# EAGLE board lv1-imu-array-1 (EAGLE 3.55)
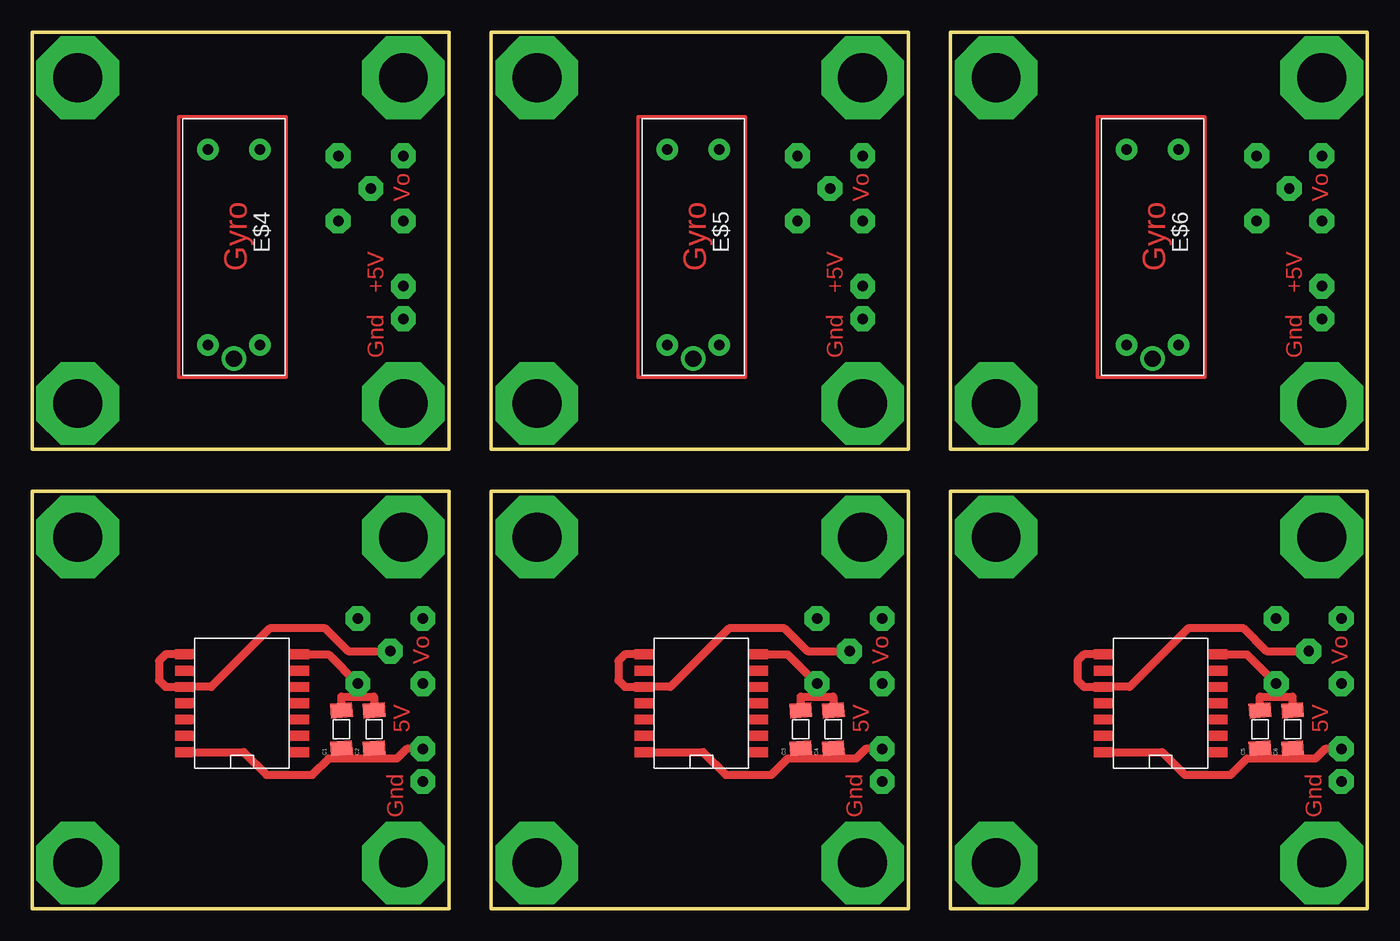
[diagram p0: board, top side]
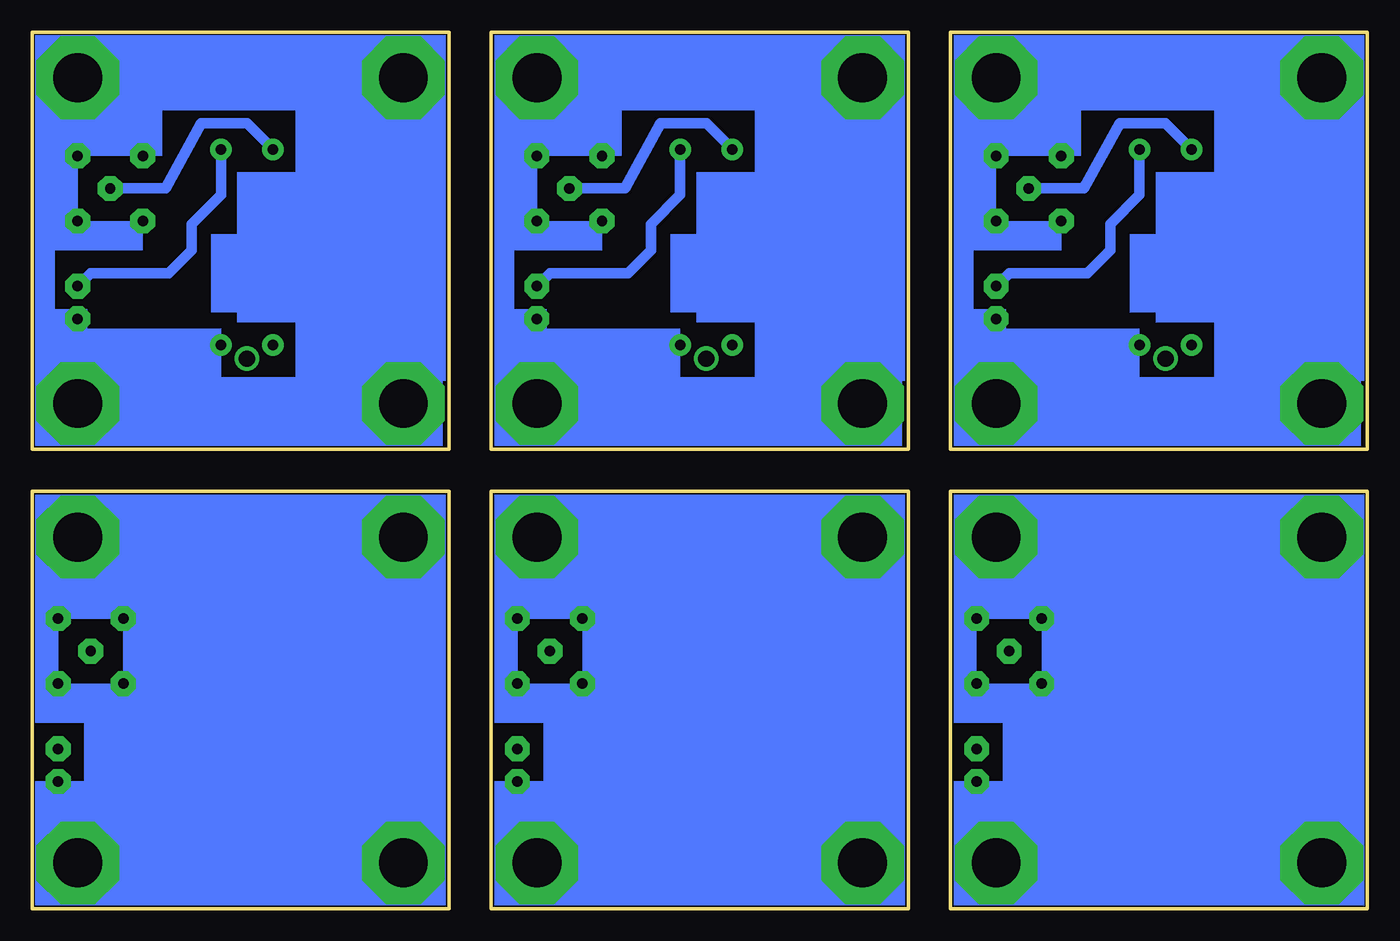
[diagram p1: board, bottom side, seen from below]

Size 104.14 x 68.33 mm. Coordinates in mm from the lower left corner, seen from the top.
Outline: 0,0 0,32.51 32.51,32.51 32.51,0 0,0
Outline: 35.81,0 35.81,32.51 68.33,32.51 68.33,0 35.81,0
Outline: 71.63,0 71.63,32.51 104.14,32.51 104.14,0 71.63,0
Outline: 0,35.81 0,68.33 32.51,68.33 32.51,35.81 0,35.81
Outline: 35.81,35.81 35.81,68.33 68.33,68.33 68.33,35.81 35.81,35.81
Outline: 71.63,35.81 71.63,68.33 104.14,68.33 104.14,35.81 71.63,35.81
Copper layers used: Top, Bottom

## Footprints (pad centres in the part's own frame; a part is rotated, then mirrored left to right if it is on the bottom)
06 = smd 1.143 x 1.702 rotated 4.4:  1.473,0 | smd 1.143 x 1.702 rotated 4.3:  -1.473,0
-16DO = drill 1.27 pad 1.778 round:  8.7,0 | drill 0.813 pad 1.676 round:  7.62,2.032;  7.62,-2.032;  -7.62,2.032;  -7.62,-2.032

## Placement (x,y rotation side)
C1  100nF  [06]  24.13,13.97 90 top
C2  1uF  [06]  26.67,13.97 90 top
C3  100nF  [06]  59.94,13.97 90 top
C4  1uF  [06]  62.48,13.97 90 top
C5  100nF  [06]  95.76,13.97 90 top
C6  1uF  [06]  98.3,13.97 90 top
E$1  [-14]  16.26,16.26 90 top
E$2  [-14]  52.07,16.26 90 top
E$3  [-14]  87.88,16.26 90 top
E$4  [-16DO]  15.75,51.56 270 top
E$5  [-16DO]  51.56,51.56 270 top
E$6  [-16DO]  87.38,51.56 270 top

## Library data of the parts
C1-C6 = SMD
E$1-E$3 = SMD-IC
E$4-E$6 = AESS

## Tracks (layer width: path | path; a pad name or v marks a point on that pad's centre or on a via)
S$4  (via drill 3.81 pad 6.45)
  other vias: 3.56,3.56
S$5  (via drill 3.81 pad 6.45)
  other vias: 3.56,28.96
S$6  (via drill 3.81 pad 6.45)
  other vias: 39.37,3.56
S$7
  Top 0.61: 11.43,19.81 10.41,19.81 9.91,19.3 9.91,17.78 10.41,17.27 11.43,17.27
S$8  (via drill 3.81 pad 6.45)
  other vias: 28.96,28.96
S$9  (via drill 3.81 pad 6.45)
  other vias: 28.96,3.56
S$10  (via drill 0.81 pad 1.93)
  other vias: 30.48,9.91
S$11  (via drill 0.81 pad 1.93)
  Top 0.61: v27.94,20.07 24.64,20.07 22.86,21.84 18.54,21.84 13.97,17.27 12.45,17.27
S$12  (via drill 0.81 pad 1.93)
  Top 0.61: 12.45,12.19 16.51,12.19 18.29,10.41 21.84,10.41 23.11,11.68 28.45,11.68 29.21,12.45 v30.48,12.45
S$13  (via drill 0.81 pad 1.93)
  other vias: 30.48,17.53
S$14  (via drill 0.81 pad 1.93)
  Top 0.61: 24.13,15.75 24.13,16.51 25.4,16.51 | 25.4,16.51 26.67,16.51 26.67,15.75 | 21.08,19.81 23.11,19.81 v25.4,17.53 25.4,16.51
S$15  (via drill 0.81 pad 1.93)
  other vias: 30.48,22.61
S$16  (via drill 0.81 pad 1.93)
  other vias: 25.4,22.61
S$17  (via drill 3.81 pad 6.45)
  other vias: 39.37,28.96
S$18  (via drill 3.81 pad 6.45)
  other vias: 64.77,28.96
S$19  (via drill 3.81 pad 6.45)
  other vias: 64.77,3.56
S$20  (via drill 0.81 pad 1.93)
  other vias: 66.29,17.53
S$21  (via drill 0.81 pad 1.93)
  other vias: 66.29,22.61
S$22  (via drill 0.81 pad 1.93)
  other vias: 61.21,22.61
S$23  (via drill 0.81 pad 1.93)
  other vias: 66.29,9.91
S$24  (via drill 0.81 pad 1.93)
  Top 0.61: v63.75,20.07 60.45,20.07 58.67,21.84 54.36,21.84 49.78,17.27 48.26,17.27
S$25
  Top 0.61: 47.24,19.81 46.23,19.81 45.72,19.3 45.72,17.78 46.23,17.27 47.24,17.27
S$26  (via drill 0.81 pad 1.93)
  Top 0.61: 48.26,12.19 52.32,12.19 54.1,10.41 57.66,10.41 58.93,11.68 64.26,11.68 65.02,12.45 v66.29,12.45
S$27  (via drill 0.81 pad 1.93)
  Top 0.61: 59.94,15.75 59.94,16.51 61.21,16.51 | 61.21,16.51 62.48,16.51 62.48,15.75 | 56.9,19.81 58.93,19.81 v61.21,17.53 61.21,16.51
S$28  (via drill 3.81 pad 6.45)
  other vias: 75.18,3.56
S$29  (via drill 3.81 pad 6.45)
  other vias: 75.18,28.96
S$30  (via drill 3.81 pad 6.45)
  other vias: 100.58,28.96
S$31  (via drill 3.81 pad 6.45)
  other vias: 100.58,3.56
S$32  (via drill 0.81 pad 1.93)
  other vias: 102.11,17.53
S$33  (via drill 0.81 pad 1.93)
  other vias: 102.11,22.61
S$34  (via drill 0.81 pad 1.93)
  other vias: 97.03,22.61
S$35  (via drill 0.81 pad 1.93)
  other vias: 102.11,9.91
S$36  (via drill 0.81 pad 1.93)
  Top 0.61: v99.57,20.07 96.27,20.07 94.49,21.84 90.17,21.84 85.6,17.27 84.07,17.27
S$37
  Top 0.61: 83.06,19.81 82.04,19.81 81.53,19.3 81.53,17.78 82.04,17.27 83.06,17.27
S$38  (via drill 0.81 pad 1.93)
  Top 0.61: 84.07,12.19 88.14,12.19 89.92,10.41 93.47,10.41 94.74,11.68 100.08,11.68 100.84,12.45 v102.11,12.45
S$39  (via drill 0.81 pad 1.93)
  Top 0.61: 95.76,15.75 95.76,16.51 97.03,16.51 | 97.03,16.51 98.3,16.51 98.3,15.75 | 92.71,19.81 94.74,19.81 v97.03,17.53 97.03,16.51
S$40  (via drill 3.81 pad 6.45)
  other vias: 3.56,39.37
S$41  (via drill 3.81 pad 6.45)
  other vias: 3.56,64.77
S$42  (via drill 3.81 pad 6.45)
  other vias: 28.96,64.77
S$43  (via drill 3.81 pad 6.45)
  other vias: 28.96,39.37
S$44
  Top 0.254: 19.81,41.4 11.43,41.4 11.43,61.72 19.81,61.72 19.81,41.4
S$45  (via drill 0.81 pad 1.93)
  other vias: 23.88,53.59
S$46  (via drill 0.81 pad 1.93)
  other vias: 28.96,53.59
S$47  (via drill 0.81 pad 1.93)
  other vias: 28.96,58.67
S$48  (via drill 0.81 pad 1.93)
  other vias: 23.88,58.67
S$49  (via drill 0.81 pad 1.93)
  Bottom 0.813: 13.72,59.18 15.75,61.21 19.3,61.21 22.1,56.13 v26.42,56.13
S$50  (via drill 0.81 pad 1.93)
  other vias: 28.96,45.97
S$51  (via drill 0.81 pad 1.93)
  Bottom 0.813: 17.78,59.18 17.78,55.63 20.07,53.34 20.07,51.31 21.84,49.53 27.94,49.53 v28.96,48.51
S$52  (via drill 3.81 pad 6.45)
  other vias: 39.37,39.37
S$53  (via drill 3.81 pad 6.45)
  other vias: 39.37,64.77
S$54  (via drill 3.81 pad 6.45)
  other vias: 64.77,64.77
S$55  (via drill 3.81 pad 6.45)
  other vias: 64.77,39.37
S$56
  Top 0.254: 55.63,41.4 47.24,41.4 47.24,61.72 55.63,61.72 55.63,41.4
S$57  (via drill 0.81 pad 1.93)
  other vias: 59.69,53.59
S$58  (via drill 0.81 pad 1.93)
  other vias: 64.77,53.59
S$59  (via drill 0.81 pad 1.93)
  other vias: 64.77,58.67
S$60  (via drill 0.81 pad 1.93)
  other vias: 59.69,58.67
S$61  (via drill 0.81 pad 1.93)
  Bottom 0.813: 49.53,59.18 51.56,61.21 55.12,61.21 57.91,56.13 v62.23,56.13
S$62  (via drill 0.81 pad 1.93)
  other vias: 64.77,45.97
S$63  (via drill 0.81 pad 1.93)
  Bottom 0.813: 53.59,59.18 53.59,55.63 55.88,53.34 55.88,51.31 57.66,49.53 63.75,49.53 v64.77,48.51
S$64  (via drill 3.81 pad 6.45)
  other vias: 75.18,39.37
S$65  (via drill 3.81 pad 6.45)
  other vias: 75.18,64.77
S$66  (via drill 3.81 pad 6.45)
  other vias: 100.58,64.77
S$67  (via drill 3.81 pad 6.45)
  other vias: 100.58,39.37
S$68
  Top 0.254: 91.44,41.4 83.06,41.4 83.06,61.72 91.44,61.72 91.44,41.4
S$69  (via drill 0.81 pad 1.93)
  other vias: 95.5,53.59
S$70  (via drill 0.81 pad 1.93)
  other vias: 100.58,53.59
S$71  (via drill 0.81 pad 1.93)
  other vias: 100.58,58.67
S$72  (via drill 0.81 pad 1.93)
  other vias: 95.5,58.67
S$73  (via drill 0.81 pad 1.93)
  Bottom 0.813: 85.34,59.18 87.38,61.21 90.93,61.21 93.73,56.13 v98.04,56.13
S$74  (via drill 0.81 pad 1.93)
  other vias: 100.58,45.97
S$75  (via drill 0.81 pad 1.93)
  Bottom 0.813: 89.41,59.18 89.41,55.63 91.69,53.34 91.69,51.31 93.47,49.53 99.57,49.53 v100.58,48.51
(copper drawn outside any net)
  shapes: Bottom area x66

## Text on the board
Top: Gyro | Vo | Gyro | Vo | Gyro | Vo | +5V | +5V | +5V | Gnd | Gnd | Gnd | Vo | Vo | Vo | 5V | 5V | 5V | Gnd | Gnd | Gnd